# EAGLE board tilt_brick (EAGLE 7.2.0)
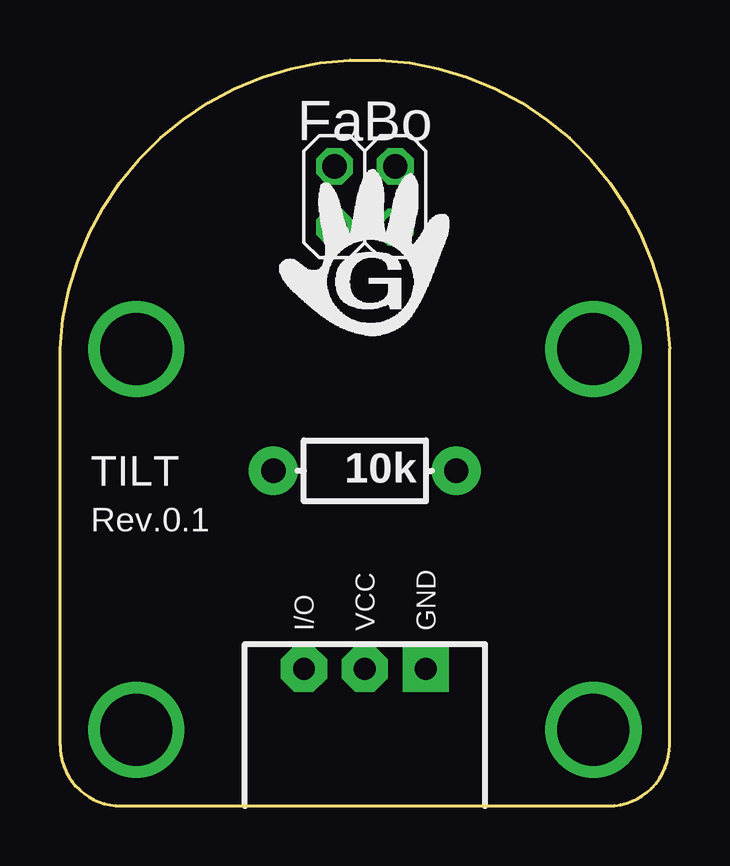
[diagram p0: board, top side]
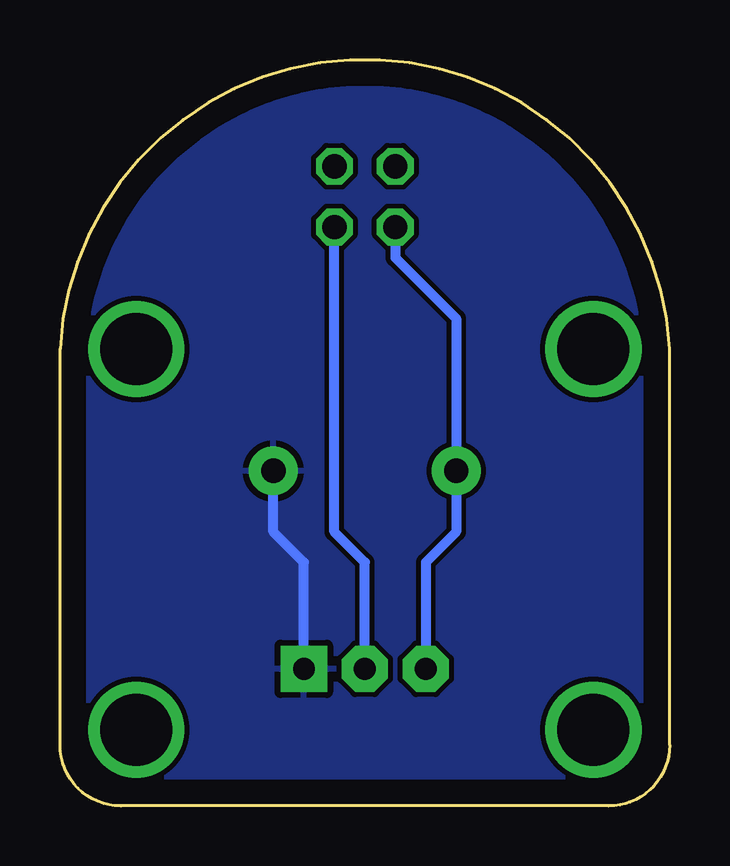
[diagram p1: board, bottom side, seen from below]

Size 25.4 x 31.1 mm. Coordinates in mm from the lower left corner, seen from the top.
Copper layers (1*16): Top 0.035mm / dielectric 1.5mm / Bottom 0.035mm
Design rules "default": minimum track width 10mil, minimum drill 24mil, track to track 8mil, track to pad 8mil, pad to pad 8mil, via to via 8mil, smd to smd 8mil, copper to edge 40mil, drill to drill 8mil, minimum pad ring 10mil, minimum via ring 8mil, stop-mask expansion 4mil, vias tented up to drill 0mil, thermal gap 10mil

## Footprints (pad centres in the part's own frame; a part is rotated, then mirrored left to right if it is on the bottom)
BRICK_3PIN = drill 0.9 pad 1.93 square: GND 2.54,-9.525 | drill 0.9 pad 1.93 octagon: IN/OUT -2.54,-9.525; VCC 0,-9.525 | drill 3 pad 3.81: P$1 -9.525,3.81; P$2 9.525,3.81; P$3 9.525,-12.065; P$4 -9.525,-12.065
AXIAL-0.3-KIT = drill 1.016 pad 2.032: P$1 -3.81,0; P$2 3.81,0
2X02 = drill 1.016 octagon: 1 -1.27,-1.27; 2 -1.27,1.27; 3 1.27,-1.27; 4 1.27,1.27

## Placement (x,y rotation side)
J1  BRICK_3PIN  [BRICK_3PIN]  12.7,15.24 0 top
R1  10k  [AXIAL-0.3-KIT]  12.7,13.97 180 top
U1  TILT  [2X02]  12.7,25.4 0 top

## Library data of the parts
J1 = Gclue
R1 = SparkFun
U1 = pinhead

## Nets
GND: J1.GND R1.P$1
N$3: J1.IN/OUT R1.P$2 U1.1
N$5: J1.VCC U1.3

## Tracks (layer width: path | path; a pad name or v marks a point on that pad's centre or on a via)
GND
  Bottom 0.406: J1.GND 15.24,10.16 16.51,11.43 R1.P$1
  pour Bottom: -0.64,-0.63 26.04,-0.63 26.04,31.75 -0.64,31.75
N$3
  Bottom 0.406: U1.1 11.43,22.86 8.89,20.32 R1.P$2 8.89,11.43 10.16,10.16 J1.IN/OUT
N$5
  Bottom 0.406: J1.VCC 12.7,10.16 13.97,11.43 U1.3

## Text on the board
tPlace: TILT | Rev.0.1